# EAGLE board ESP_programmer (EAGLE 8.1.1)
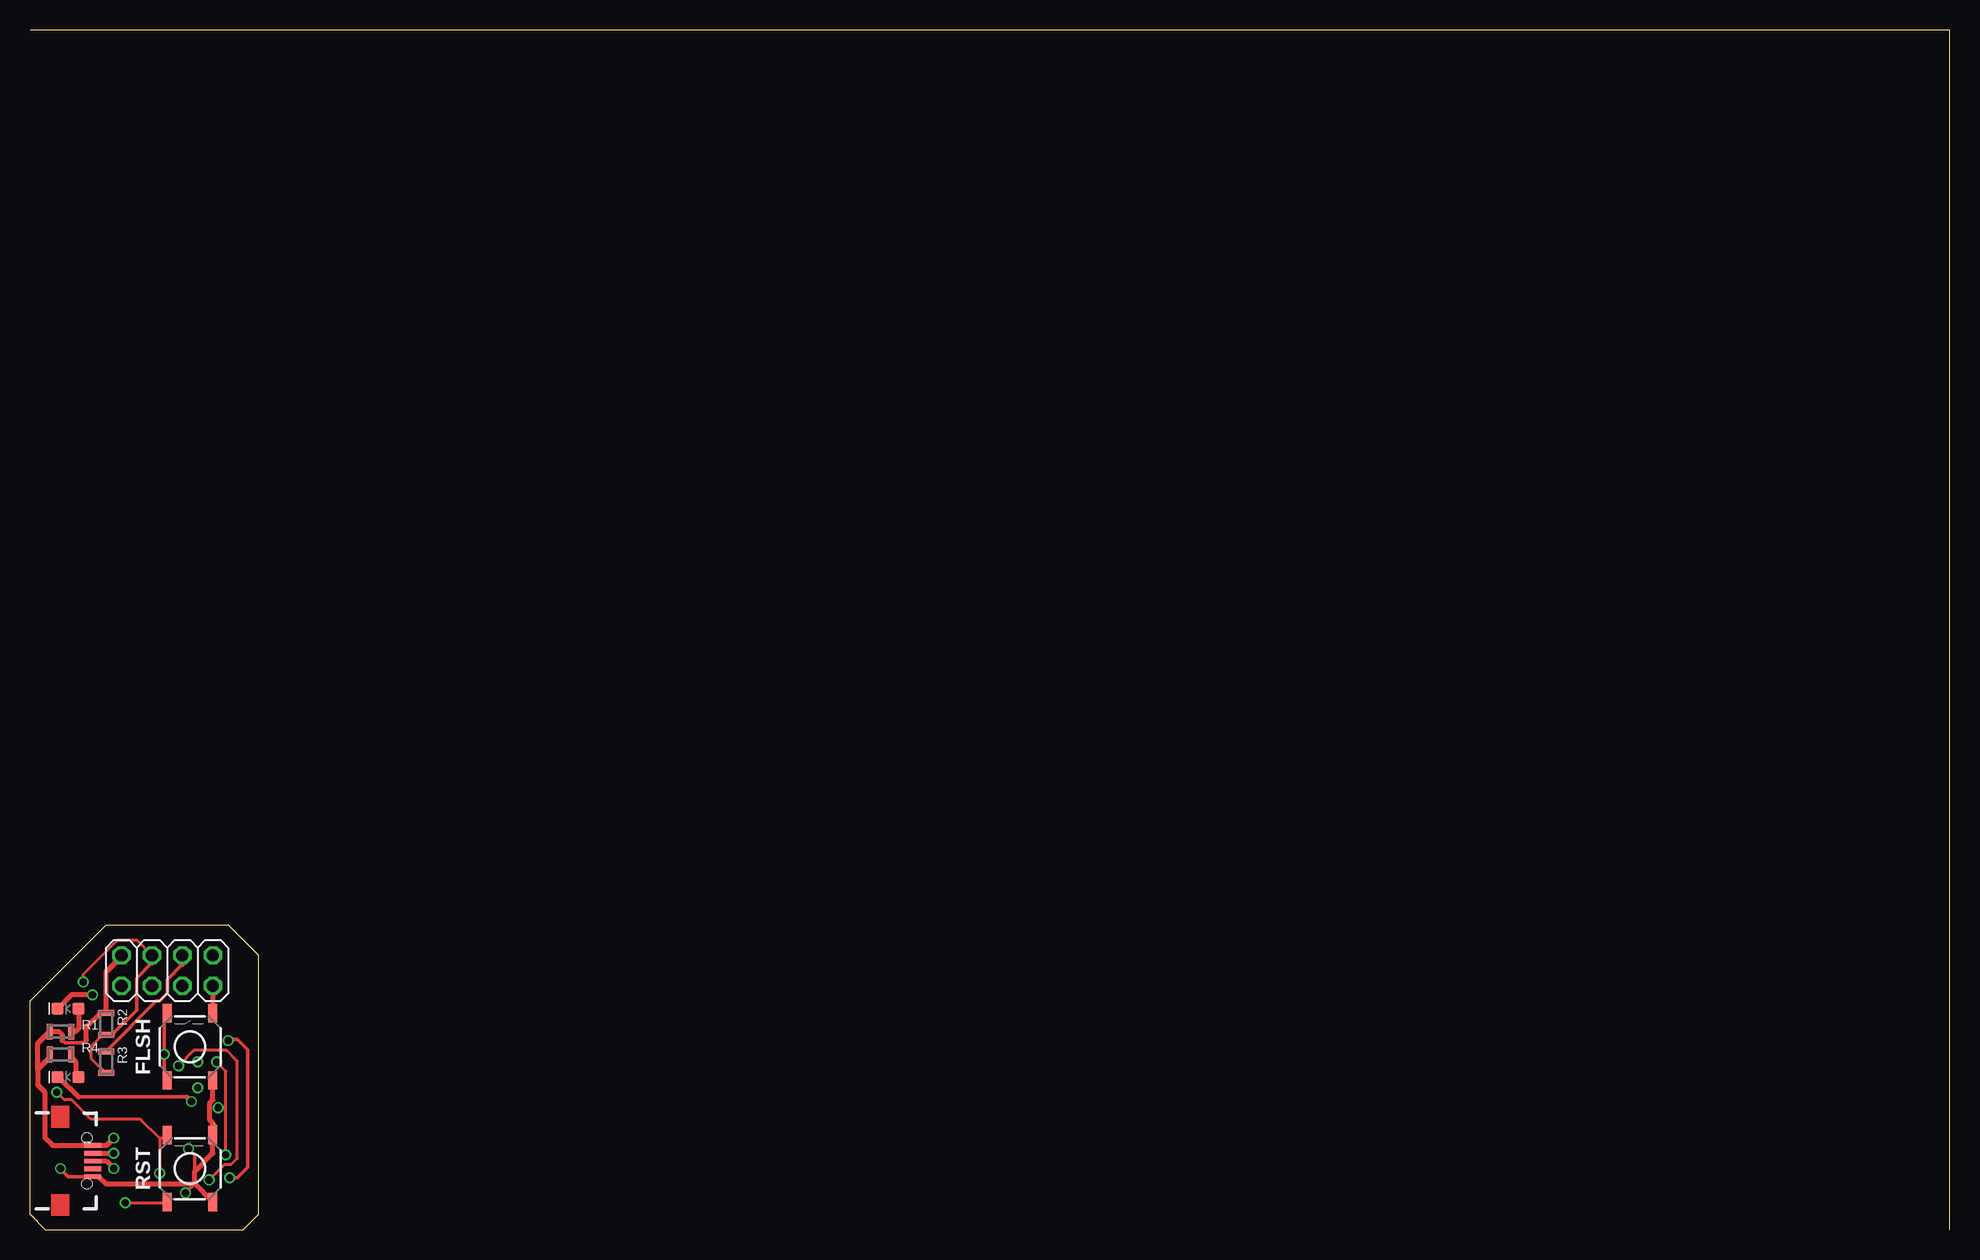
[diagram p0: board, top side]
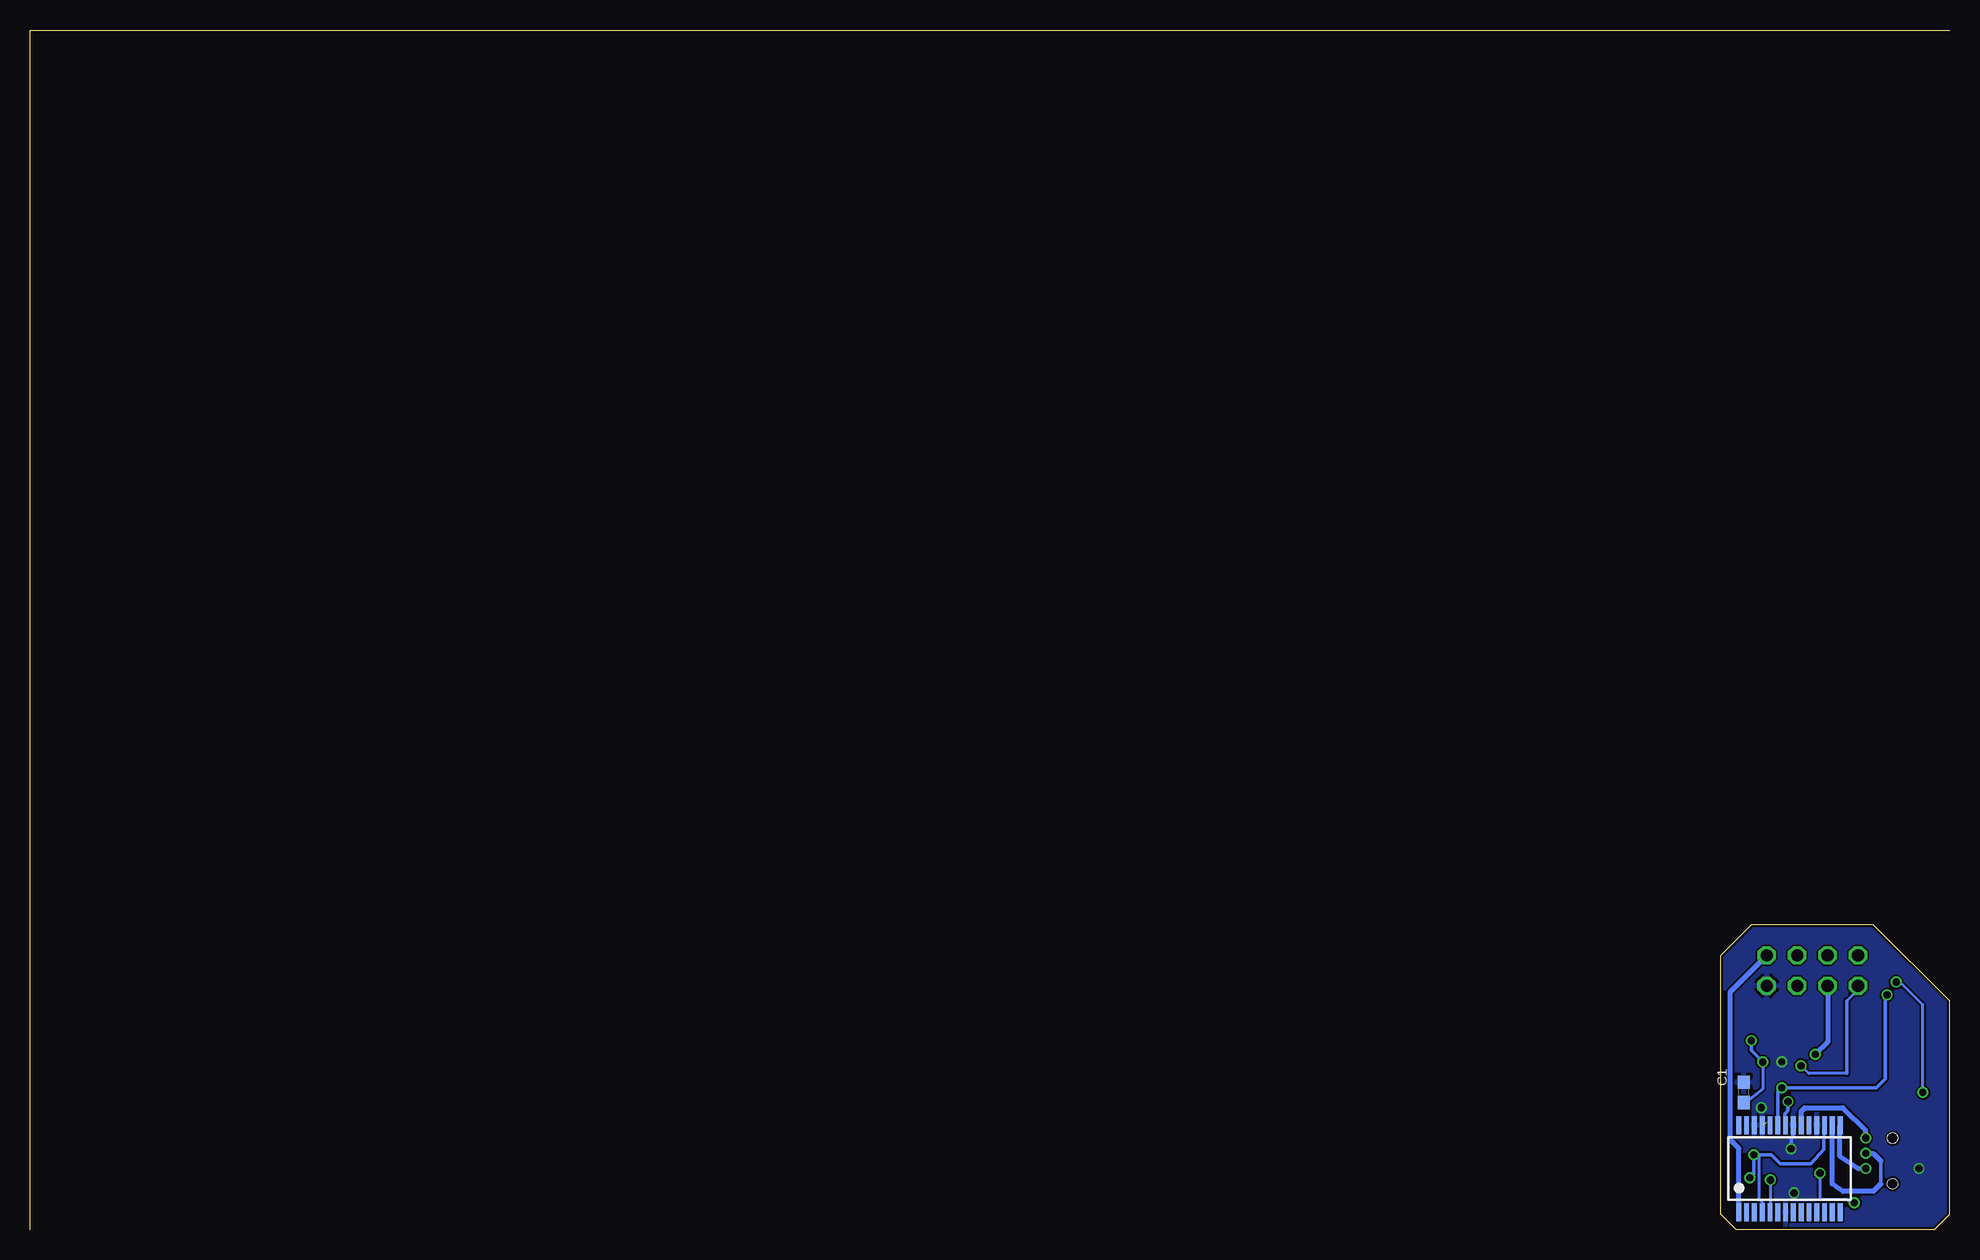
[diagram p1: board, bottom side, seen from below]

Size 160 x 100 mm. Coordinates in mm from the lower left corner, seen from the top.
Outline: 160,0 160,100 0,100
Outline: 1.27,0 0,1.27 0,19.05 6.35,25.4 16.51,25.4 19.05,22.86 19.05,1.27 17.78,0 1.27,0
Copper layers (1*16): Top 0.035mm / dielectric 1.5mm / Bottom 0.035mm
Design rules "SeeedStudio_2layer_DRU_no_angle_20140221 *": minimum track width 6mil, minimum drill 12mil, track to track 6mil, track to pad 6mil, pad to pad 6mil, via to via 6mil, smd to smd 0mil, copper to edge 8mil, drill to drill 10mil, minimum pad ring 10mil, minimum via ring 6mil, stop-mask expansion 2mil, vias tented up to drill 100mil, thermal gap 10mil

## Footprints (pad centres in the part's own frame; a part is rotated, then mirrored left to right if it is on the bottom)
0603 = smd 1.1 x 1: 1 -0.85,0; 2 0.85,0
LED-0603 = smd 1 x 1: A -0.877,0; C 0.877,0
TACTILE_SWITCH_SMD_5.2MM = smd 1.524 x 0.762: 1 -2.794,1.905; 2 2.794,1.905; 3 -2.794,-1.905; 4 2.794,-1.905
SSOP28 = smd 0.4 x 1.5: 1 -4.225,-3.625; 2 -3.575,-3.625; 3 -2.925,-3.625; 4 -2.275,-3.625; 5 -1.625,-3.625; 6 -0.975,-3.625; 7 -0.325,-3.625; 8 0.325,-3.625; 9 0.975,-3.625; 10 1.625,-3.625; 11 2.275,-3.625; 12 2.925,-3.625; 13 3.575,-3.625; 14 4.225,-3.625; 15 4.225,3.625; 16 3.575,3.625; 17 2.925,3.625; 18 2.275,3.625; 19 1.625,3.625; 20 0.975,3.625; 21 0.325,3.625; 22 -0.325,3.625; 23 -0.975,3.625; 24 -1.625,3.625; 25 -2.275,3.625; 26 -2.925,3.625; 27 -3.575,3.625; 28 -4.225,3.625
2X04 = drill 1.016 octagon: 1 -3.81,-1.27; 2 -3.81,1.27; 3 -1.27,-1.27; 4 -1.27,1.27; 5 1.27,-1.27; 6 1.27,1.27; 7 3.81,-1.27; 8 3.81,1.27
MINI_MELF-0102R = smd 0.5 x 1.3: 1 -0.9,0; 2 0.9,0
USB-MICRO-SMD = smd 1.4 x 0.4: D+1 2.7,0; D-1 2.7,0.65; GND1 2.7,-1.3; ID1 2.7,-0.65; VBUS1 2.7,1.3 | hole 0.85: 2.2,1.9; 2.2,-1.9

## Placement (x,y rotation side)
C1  100nF  [0603]  17.14,11.43 90 bottom
D1  TX  [LED-0603]  3.17,18.41 180 top
D2  RX  [LED-0603]  3.17,12.7 180 top
FLSH  MOMENTARY-SWITCH-SPST-SMD-5.2-REDUNDANT  [TACTILE_SWITCH_SMD_5.2MM]  13.34,15.24 90 top
IC1  FT232RL  [SSOP28]  13.34,5.08 0 bottom
JP1  [2X04]  11.43,21.59 0 top
R1  270  [MINI_MELF-0102R]  2.54,16.51 180 top
R2  10k  [MINI_MELF-0102R]  6.35,17.14 270 top
R3  10k  [MINI_MELF-0102R]  6.35,13.97 270 top
R4  270  [MINI_MELF-0102R]  2.54,14.61 180 top
RST  MOMENTARY-SWITCH-SPST-SMD-5.2-REDUNDANT  [TACTILE_SWITCH_SMD_5.2MM]  13.34,5.08 90 top
U1  [USB-MICRO-SMD]  2.54,5.71 0 top

## Library data of the parts
C1 = SparkFun-Capacitors; PROD_ID: CAP-07822
D1 D2 = SparkFun-LED; PROD_ID: DIO-08575
FLSH RST = SparkFun-Switches; PROD_ID: SWCH-08247; SF_SKU: COM-08720
IC1 = ftdichip; MPN: FT232RL; OC_FARNELL: 1146032; OC_NEWARK: 91K9918
JP1 = FPAA_pinhead
R1-R4 = resistor
U1 = USB_micro

## Nets
\: IC1.5 JP1.1
CH_PD: JP1.6 R3.1
GPIO0: FLSH.1 FLSH.2 JP1.3
GPIO2: JP1.5
N$1: D2.A R4.1
N$2: IC1.16 U1.D-1
N$3: IC1.15 U1.D+1
N$4: D1.A R1.1
N$5: C1.1 IC1.4 IC1.17
N$6: D1.C IC1.23
N$8: D2.C IC1.22
RST: JP1.4 R2.2 R3.2 RST.1 RST.2
TXD: IC1.1 JP1.8
V+: IC1.20 JP1.2 R1.2 R2.1 R4.2 U1.VBUS1
V-: C1.2 FLSH.3 FLSH.4 IC1.7 IC1.18 IC1.21 IC1.25 IC1.26 JP1.7 RST.3 RST.4 U1.GND1

## Tracks (layer width: path | path; a pad name or v marks a point on that pad's centre or on a via)
\  (via drill 0.61)
  Top 0.254: v14.92,4.13 16.19,5.4 16.74,5.4 17.27,5.93 17.27,14.03 16.38,14.92 13.65,14.92 v12.38,13.65
  Bottom 0.254: v14.92,4.13 14.92,1.59 IC1.5 | v12.38,13.65 11.75,13.02 8.57,13.02 | 8.57,19.05 7.62,20 JP1.1
  Bottom 0.305: 8.57,19.05 8.57,13.02
CH_PD
  Top 0.305: R3.1 10.53,19.05 10.79,19.05 11.43,19.68 11.43,20.83 12.7,22.1
  Top 0.406: JP1.6 12.7,22.1
GPIO0  (via drill 0.6)
  Top 0.305: FLSH.2 11.18,17.78 v11.18,14.61 11.18,12.7 FLSH.1
  Bottom 0.406: JP1.3 10.16,15.62 v11.18,14.61
N$1
  Top 0.406: R4.1 3.44,14.34 3.81,13.97 3.81,12.94 D2.A
N$2  (via drill 0.6)
  Top 0.406: U1.D-1 6.97,6.37 v6.99,6.35
  Bottom 0.305: 5.71,5.71 5.71,3.81
  Bottom 0.406: v6.99,6.35 6.35,6.35 5.71,5.71 | 5.71,3.81 6.35,3.17 8.89,3.17 9.78,3.81 9.78,8.47 IC1.16
N$3  (via drill 0.6)
  Top 0.406: U1.D+1 6.35,5.71 v6.99,5.08
  Bottom 0.406: v6.99,5.08 7.62,5.08 9.14,6.1 9.14,8.48 IC1.15
N$4
  Top 0.254: 3.81,16.51 R1.1
  Top 0.406: D1.A 4.05,16.75 3.81,16.51
N$5  (via drill 0.6, 0.61)
  Top 0.254: v15.56,13.97 16.32,13.21 v16.32,6.22
  Top 0.305: v16.64,4.32 17.27,4.32 18.16,5.21 18.16,14.99 17.27,15.88 16.64,15.88 v16.51,15.75
  Bottom 0.254: v15.56,13.97 15.56,11.75 17.14,10.48 C1.1 | v16.32,6.22 15.88,6.03 15.88,2.54 15.56,2.22 15.56,1.59 IC1.4 | 10.48,7.62 10.48,8.57 IC1.17
  Bottom 0.305: 10.48,7.62 10.48,6.67 11.56,5.46 14.1,5.46 14.86,6.22 v16.32,6.22 16.32,4.64 v16.64,4.32 | v16.51,15.75 16.51,14.92 v15.56,13.97
N$6  (via drill 0.6)
  Top 0.406: v5.21,19.56 3.44,19.56 D1.C
  Bottom 0.305: 5.33,19.43 5.33,12.57 6.1,11.81 v13.97,11.81 14.31,11.47 IC1.23
  Bottom 0.406: 5.33,19.43 v5.21,19.56
N$8  (via drill 0.6)
  Top 0.305: 4.06,11.05 13.08,11.05
  Top 0.406: D2.C 2.41,12.7 4.06,11.05 | 13.08,11.05 v13.46,10.67
  Bottom 0.305: v13.46,10.67 13.46,9.91 13.72,9.65 13.72,8.76 IC1.22
RST  (via drill 0.61)
  Top 0.254: R3.2 6.35,13.02 5.08,14.29 5.08,15.24 6.03,16.19 6.35,16.19 R2.2 | v7.94,2.22 11.43,2.22 RST.1 | 10.79,7.62 v10.79,4.7 | 10.79,7.62 11.43,7.62 RST.2 | JP1.4 8.89,24.13 7.3,24.13 4.45,21.27 v4.45,20.64 | v2.22,11.43 2.86,10.79 3.49,10.79 5.08,9.21 9.21,9.21 10.79,7.62
  Top 0.305: 10.16,22.23 8.89,20.95 8.89,18.29 6.86,16.26
  Top 0.406: JP1.4 10.16,22.23 | 6.86,16.26 R2.2
  Bottom 0.254: v7.94,2.22 8.26,2.22 8.57,2.54 10.79,2.54 v10.79,4.7 | v4.45,20.64 4.13,20.64 2.22,18.73 v2.22,11.43
TXD
  Bottom 0.406: IC1.1 17.56,6.76 18.29,7.49 18.29,19.81 JP1.8
V+  (via drill 0.6)
  Top 0.305: 2.67,15.75 2.92,15.54 4.45,15.54 4.7,15.8
  Top 0.406: 0.64,13.34 0.64,12.06 1.27,11.43 1.27,7.62 1.88,7.01 U1.VBUS1 6.38,7.01 v6.99,7.62 | 0.64,13.34 0.64,15.51 R1.2 2.41,16.51 2.67,16.26 2.67,15.75 | R4.2 1.64,14.34 0.64,13.34 | 4.7,15.8 4.7,16.89 5.84,18.03 R2.1 6.35,21.46 7.11,22.23 7.11,22.35 JP1.2
  Bottom 0.406: v6.99,7.62 6.99,8.26 8.89,10.16 12.06,10.16 12.36,9.87 IC1.20
V-  (via drill 0.6)  (1 unrouted)
  Top 0.305: v2.54,5.08 3.21,4.42 U1.GND1 5.75,4.42 | 13.72,4.83 13.72,6.22 v13.21,6.73 | v12.95,3.05 13.72,3.81 13.72,4.32
  Top 0.406: 5.75,4.42 6.35,3.81 13.72,3.81 | 13.72,3.81 RST.3 | 13.72,3.81 13.72,4.83 15.24,6.35 RST.4 15.24,8.89 14.99,9.14 14.99,10.54 15.24,10.79 FLSH.3 | JP1.7 FLSH.4
  Bottom 0.254: JP1.7 15.29,20.37
  Bottom 0.305: v13.21,6.73 13.21,7.62 13.08,7.75 13.08,8
  other vias: 13.97,13.97 15.7,10.16
  pour Bottom: 4.83,25.53 -2.16,18.54 -2.16,2.29 1.27,-1.14 19.94,-1.14 20.32,-0.76 20.32,24.89 19.43,25.78 5.08,25.78